# Altium PCB rapidcamera.PcbDoc
Units mil, origin at the board's own origin, x right, y up, seen from the top; angles counter-clockwise.
Board outline 6000 x 4000 mil, 2 copper layers (Top Layer, Bottom Layer); 33 components, 40 nets, 181 pads, 0 vias.
Unrouted connection lines stored in the file: 17.
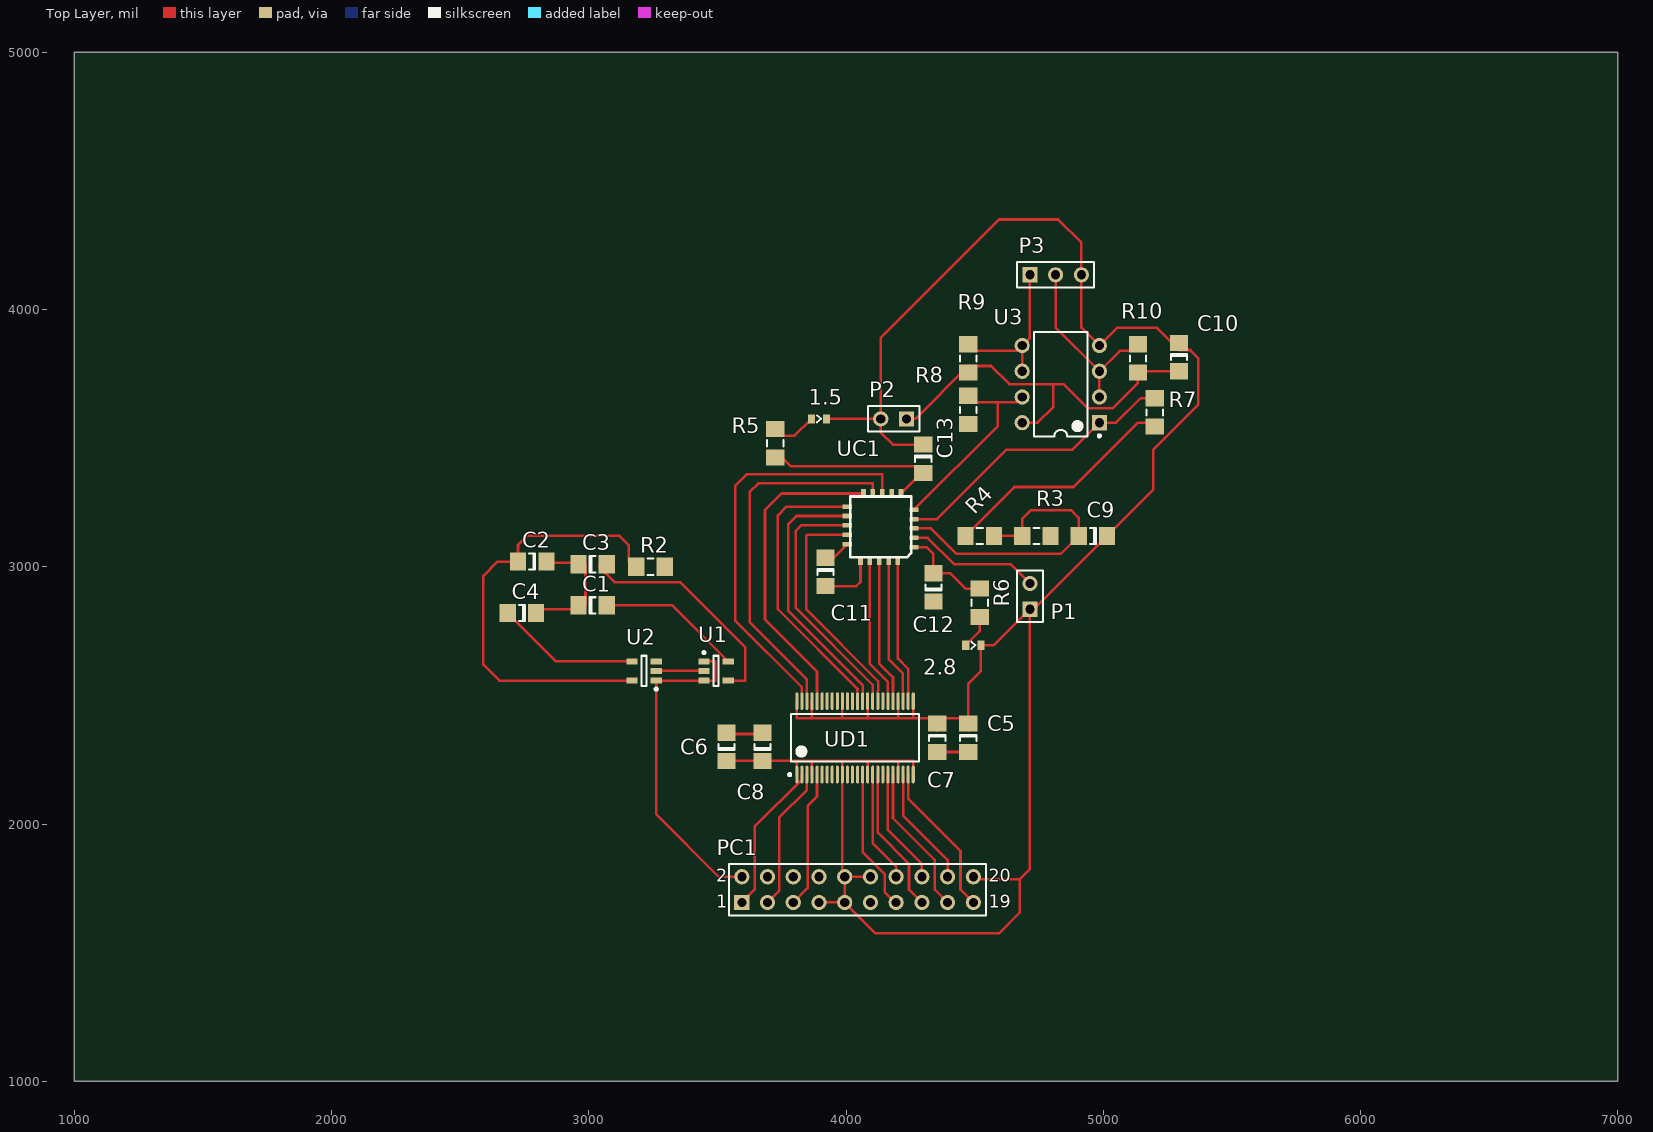
[diagram p0: Top Layer view]
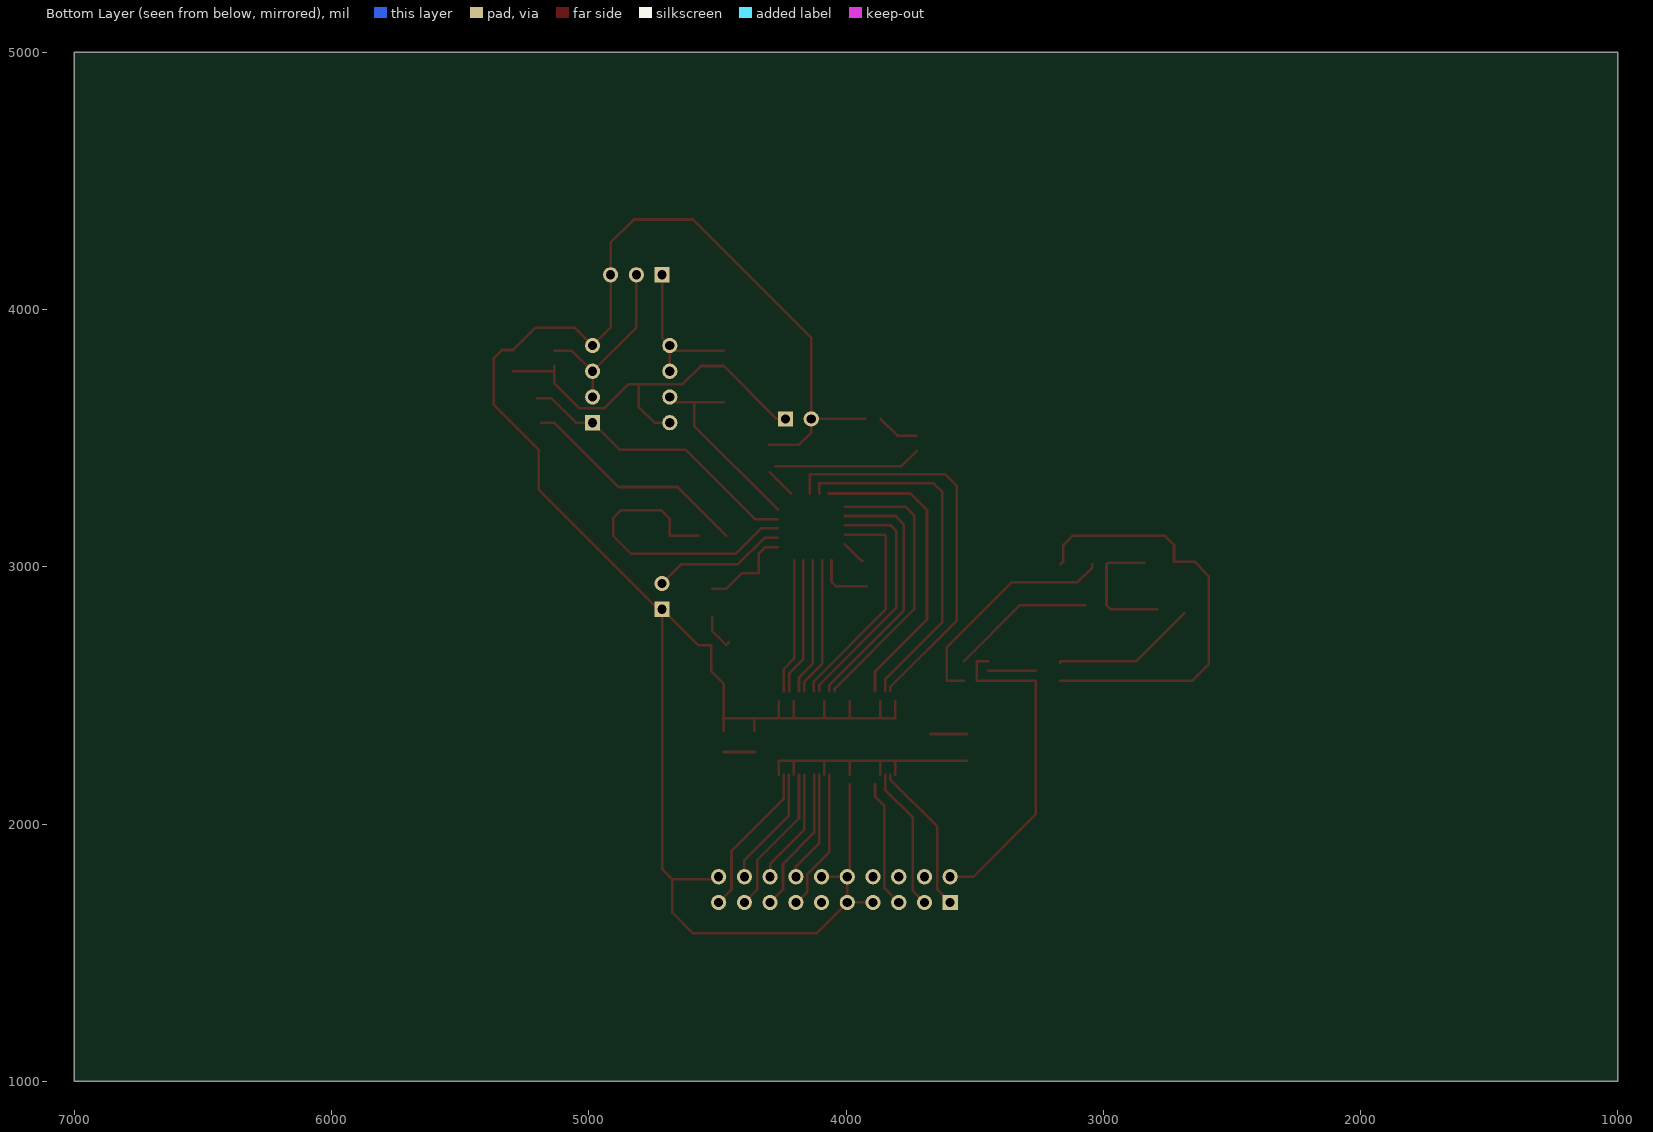
[diagram p1: Bottom Layer view, seen from below]

## Layer stack, top to bottom
Top Layer: signal copper 1.4
Dielectric: dielectric 12.6, FR-4, Dk 4.8
Bottom Layer: signal copper 1.4

## Board outline
1000,1000 7000,1000 7000,5000 1000,5000

## Design rules (kind name [scope] priority, off if disabled: settings)
Clearance [All] p1: gap=6
PolygonConnect [All] p1: connectstyle=Relief reliefconductorwidth=10 reliefentries=4 polygonreliefangle="90 Angle"
RoutingVias [All] p1: holewidth=28 width=50 viastyle="Through Hole" minholewidth=28 minwidth=50 maxholewidth=28 maxwidth=50
SilkscreenOverComponentPads [All] p1: minsilkscreentomaskgap=10
SolderMaskExpansion [All] p1: expansion=4
Width [All] p1: maxlimit=10 minlimit=10 preferedwidth=10
27 further rules are at their usual default settings.

## Components (designator, comment, footprint, x,y, rotation, side; value= is the part's Value field where it differs from the comment)
1.5 "LED2" DIODE1608 3895,3575 r0 top
2.8 "LED2" DIODE1608 4495,2695 r0 top
C1 "C1206" 1206 3015,2850 r0 top
C2 "C1206" 1206 2780,3020 r180 top
C3 "C1206" 1206 3015,3010 r0 top
C4 "C1206" 1206 2740,2820 r180 top
C5 "C1206" 1206 4475,2335 r270 top
C6 "C1206" 1206 3535,2300 r90 top
C7 "C1206" 1206 4355,2335 r270 top
C8 "C1206" 1206 3675,2300 r90 top
C9 "C1206" 1206 4960,3120 r180 top
C10 "C1206" 1206 5295,3815 r270 top
C11 "C1206" 1206 3920,2980 r270 top
C12 "C1206" 1206 4340,2920 r90 top
C13 "C1206" 1206 4300,3420 r270 top
P1 "Header 2" HDR1X2 4715,2835 r90 top
P2 "Header 2" HDR1X2 4235,3575 r180 top
P3 "Header 3" HDR1X3 4715,4135 r0 top
PC1 "Header 10X2" HDR2X10 3595,1695 r0 top
R2 "0" 8-1206 3240,3000 r180 top
R3 "10K" 8-1206 4740,3120 r0 top
R4 "0" 8-1206 4520,3120 r0 top
R5 "165" 8-1206 3725,3480 r270 top
R6 "165" 8-1206 4520,2860 r90 top
R7 "4.7K" 8-1206 5200,3600 r270 top
R8 "4.7K" 8-1206 4475,3610 r270 top
R9 "4.7K" 8-1206 4475,3810 r270 top
R10 "4.7K" 8-1206 5135,3810 r270 top
U1 "TPS79915DDC" TSOT23-5 3495,2595 r0 top
U2 "TPS79928DDC" TSOT23-5 3215,2595 r180 top
U3 "p82b96" DIP-8 4835,3710 r180 top
UC1 "TCM8230MD_1" TCM8230MD 4135,3155 r270 top
UD1 "SN74LVCH16T245" SN74LVCH16T245 4035,2335 r90 top

## Footprints (in the part's own frame and the unit in brackets; to place one, negate y for a bottom-side part, rotate by r counter-clockwise, add the part's x,y. Pads: shape width x height; smd on the part's side, far side on the other; paste and mask are expansions set on the pad)
8-1206 [mm] "Chip Resistor; Body 3.1 x 1.6 mm (LxW typ)"
  rect 1.6x1.8 smd: 1(-1.4,0) 2(1.4,0)
  silkscreen extent -0.3,-0.8 0.3,0.8
1206 [mm] "Chip Capacitor; Body 3.2 x 1.6 mm (LxW typ)"
  rect 1.6x1.8 smd: 1(-1.4,0) 2(1.4,0)
  silkscreen extent -0.3,-0.8 0.3,0.8
DIODE1608 [mm] "Chip Resistor, Body 1.6x0.8mm, IPC High Density"
  rect 0.7x0.9 smd: 1(-0.75,0) 2(0.75,0)
  silkscreen extent -0.2,-0.35 0.2,0.35, body extent -0.85,-0.48 0.85,0.48, height 0.9
DIP-8 [mm] "DIP; 8 Leads; Row Spacing 7.62 mm; Pitch 2.54 mm"
  rect 1.5x1.5 hole 0.9: 1(-3.81,3.81)
  round 1.5 hole 0.9: 2(-3.81,1.27) 3(-3.81,-1.27) 4(-3.81,-3.81) 5(3.81,-3.81) 6(3.81,-1.27) 7(3.81,1.27) 8(3.81,3.81)
  silkscreen extent -3.94,-5.15 2.65,5.23, body extent -3.6,-5.15 3.6,5.15, height 5.08
HDR1X2 [mm] "Connector; Header; 2 Position"
  rect 1.5x1.5 hole 0.9: 1(0,0)
  round 1.5 hole 0.9: 2(2.54,0)
  silkscreen extent -1.27,-1.27 3.81,1.27
HDR1X3 [mm] "Connector; Header; 3 Position"
  rect 1.5x1.5 hole 0.9: 1(0,0)
  round 1.5 hole 0.9: 2(2.54,0) 3(5.08,0)
  silkscreen extent -1.27,-1.27 6.35,1.27
HDR2X10 [mm] "Connector; Header; 10x2 Position"
  rect 1.5x1.5 hole 0.9: 1(0,0)
  round 1.5 hole 0.9: 2(0,2.54) 3(2.54,0) 4(2.54,2.54) 5(5.08,0) 6(5.08,2.54) 7(7.62,0) 8(7.62,2.54) 9(10.16,0) 10(10.16,2.54) 11(12.7,0) 12(12.7,2.54) 13(15.24,0) 14(15.24,2.54) 15(17.78,0) 16(17.78,2.54) 17(20.32,0) 18(20.32,2.54) 19(22.86,0) 20(22.86,2.54)
  silkscreen extent -1.27,-1.27 24.13,3.81
SN74LVCH16T245 [mm]
  oval 1.75x0.3 smd: 1(-3.625,5.75) 2(-3.625,5.25) 3(-3.625,4.75) 4(-3.625,4.25) 5(-3.625,3.75) 6(-3.625,3.25) 7(-3.625,2.75) 8(-3.625,2.25) 9(-3.625,1.75) 10(-3.625,1.25) 11(-3.625,0.75) 12(-3.625,0.25) 13(-3.625,-0.25) 14(-3.625,-0.75) 15(-3.625,-1.25) 16(-3.625,-1.75) 17(-3.625,-2.25) 18(-3.625,-2.75) 19(-3.625,-3.25) 20(-3.625,-3.75) 21(-3.625,-4.25) 22(-3.625,-4.75) 23(-3.625,-5.25) 24(-3.625,-5.75) 25(3.625,-5.75) 26(3.625,-5.25) 27(3.625,-4.75) 28(3.625,-4.25) 29(3.625,-3.75) 30(3.625,-3.25) 31(3.625,-2.75) 32(3.625,-2.25) 33(3.625,-1.75) 34(3.625,-1.25) 35(3.625,-0.75) 36(3.625,-0.25) 37(3.625,0.25) 38(3.625,0.75) 39(3.625,1.25) 40(3.625,1.75) 41(3.625,2.25) 42(3.625,2.75) 43(3.625,3.25) 44(3.625,3.75) 45(3.625,4.25) 46(3.625,4.75) 47(3.625,5.25) 48(3.625,5.75)
  silkscreen extent -3.75,-6.3 2.35,6.57, body extent -3.1,-6.3 3.1,6.3, height 1.2
TCM8230MD [mm] "VGA CAMERA MODULE 640x480"
  rect 0.45x0.6 on Top Overlay: 0(-2.275,-1.4) 0(-1.625,-1.4) 0(-0.975,-1.4) 0(-0.325,1.4) 0(-0.325,-1.4) 0(0.325,1.4) 0(0.325,-1.4) 0(0.975,1.4) 0(1.625,1.4) 0(2.275,1.4)
  rect 0.6x0.45 on Top Overlay: 0(-1.4,1.625) 0(-1.4,2.275) 0(-1.4,0.975) 0(-1.4,-0.325) 0(-1.4,0.325) 0(1.4,-0.325) 0(1.4,0.325) 0(1.4,-0.975) 0(1.4,-2.275) 0(1.4,-1.625)
  rect 0.45x0.9 smd: 1(2,3.3) 2(1.075,3.3) 3(0.15,3.3) 4(-0.775,3.3) 5(-1.7,3.3) 11(-2,-3.3) 12(-1.075,-3.3) 13(-0.15,-3.3) 14(0.775,-3.3) 15(1.7,-3.3)
  rect 0.9x0.45 smd: 6(-3.3,2) 7(-3.3,1.075) 8(-3.3,0.15) 9(-3.3,-0.775) 10(-3.3,-1.7) 16(3.3,-2) 17(3.3,-1.075) 18(3.3,-0.15) 19(3.3,0.775) 20(3.3,1.7)
  silkscreen extent -3,-3 3,3
TSOT23-5 [mm] "SOT23, 5-Leads, Body 3.0x3.0mm (max), Pitch 0.95mm, IPC Medium Density"
  rect 1.1x0.6 smd: 1(-1.2,0.95) 2(-1.2,0) 3(-1.2,-0.95) 4(1.2,-0.95) 5(1.2,0.95)
  silkscreen extent -1.32,-1.5 0.25,1.92, body extent -0.87,-1.52 0.87,1.53, height 1.1

## Part data
1.5 2.8: "Typical RED, GREEN, YELLOW, AMBER GaAs LED"
C1 C2 C3 C4 C5 C6 C7 C8 C9 C10 C11 C12 C13: "Ceramic Chip Capacitor - Standard"
P1 P2: "Header, 2-Pin"
P3: "Header, 3-Pin"
PC1: "Header, 10-Pin, Dual row"
R2 R3 R4 R5 R6 R7 R8 R9 R10: library part ERJ8GE, "Thick Film Chip Resistor, 1 Ohm to 10M Ohm Range, 5% Tolerance, 1206 Size, 0.25 W"
U1 U2: library part TPS799xxDDC, "200mA, Low Quiescent Current, Ultra-Low Noise, High PSRR  Low Dropout Linear Regulator"
UC1: "VGA CAMERA MODULE 640x480"
UD1: "16-bit bus transceiver with voltage regulation."

## Nets (pads, with @x,y where several pads share a name; then routed paths per layer and width w, separated by ;. In a path a pad name is that pad's centre, name@x,y a point inside that pad or via, vN(x,y) a via of type N, cw(c..) or ccw(c..) an arc to the next point about the centre after c; other vN are vias at no path point)
C1_CLK: P1.2 UC1.2 | length 523.7
  Top Layer w10: UC1.2 4317.32,3112.68 4420,3010 4640,3010 P1.2
C1_DOUT0: UD1.13
C1_DOUT1: PC1.13 UD1.14 | length 556.3
  Top Layer w10: UD1.14 4064.53,1890.47 4150,1805 4150,1735 4192.5,1692.5 PC1.13
C1_DOUT2: PC1.14 UD1.16 | length 435
  Top Layer w10: UD1.16 4103.9,1926.1 4195,1835 PC1.14
C1_DOUT3: PC1.15 UD1.17 | length 568.3
  Top Layer w10: UD1.17 4123.58,1966.42 4245,1845 4245,1745 PC1.15
C1_DOUT4: PC1.16 UD1.19 | length 452
  Top Layer w10: UD1.19 4162.95,1977.05 4295,1845 PC1.16
C1_DOUT5: PC1.17 UD1.20 | length 585.2
  Top Layer w10: UD1.20 4182.64,2022.36 4345,1860 4345,1745 PC1.17
C1_DOUT6: PC1.18 UD1.22 | length 468.9
  Top Layer w10: UD1.22 4222.01,2032.99 4395,1860 PC1.18
C1_DOUT7: PC1.19 UD1.23 | length 602.2
  Top Layer w10: UD1.23 4241.69,2098.31 4445,1895 4445,1745 PC1.19
C1_DVSS: 1.5.2 2.8.2 C1.1 C2.1 C3.1 C4.1 C5.1 C6.1 C7.1 C8.1 C9.1 C10.1 C11.1 C12.1 C13.1 P1.1 P2.2 P3.3 PC1.7 PC1.9 PC1.10 PC1.12 PC1.20 U1.2 U2.2 U3.4 UC1.7 UC1.15 UD1.1 UD1.4 UD1.10 UD1.15 UD1.21 UD1.24 UD1.25 UD1.28 UD1.34 UD1.39 UD1.45 UD1.48 | length 10302.3
  Top Layer w10: C4.1@2790,2835 2972.44,2835 2987.44,2850 2987.44,3010 2982.44,3015 C2.1@2840.12,3015 ; U2.2 U1.2 ; C6.1@3531.38,2246.38 3805,2246.38 ; UD1.1 3808.62,2242.76 3805,2246.38 ; UD1.48 3808.62,2411.38 3870,2411.38 ; UD1.4 3867.68,2243.7 3865,2246.38 ; UD1.45 3867.68,2413.7 3870,2411.38 ; PC1.7 PC1.9 ; 1.5.2 P2.2 ; C11.1@3935,3022.56 3939.57,3022.56 UC1.15 ; 3985,2241.38 3985.79,2240.59 UD1.10 ; 3985.79,2153.86 3985.79,1795 3985,1795 3995,1785 PC1.9 ; UD1.39 3985.79,2412.17 3985,2411.38 ; PC1.10 PC1.12 ; UD1.15 4084.21,2245.59 4085,2246.38 ; UD1.34 4084.21,2412.17 4085,2411.38 ; UD1.21 4202.32,2243.7 4205,2246.38 ; UD1.28 4202.32,2413.7 4200,2411.38 ; UD1.24 4261.38,2246.38 4205,2246.38 ; UD1.25 4261.38,2412.76 4260,2411.38 ; C13.1@4299.88,3475 4182.56,3475 4135,3522.56 P2.2 ; C7.1@4355,2362.56 4356.38,2363.94 C7.1@4356.38,2411.38 ; C5.1@4475,2362.56 C5.1@4475,2407.76 ; PC1.20 4505,1785 4675,1785 ; 3805,2246.38 3865,2246.38 ; 3865,2246.38 4085,2246.38 ; 3870,2411.38 3985,2411.38 ; 3985,2411.38 4085,2411.38 ; PC1.9 4115,1575 4595,1575 4675,1655 4675,1785 ; 4085,2246.38 4205,2246.38 ; 4085,2411.38 4200,2411.38 ; P2.2 4135,3890 4595,4350 4825,4350 4915,4260 P3.3 4915,3930 U3.4 5055,3930 5207.56,3930 5295,3842.56 5337.44,3842.56 5370,3810 5370,3630 5195,3455 5195,3299.88 C9.1 4730.12,2835 P1.1 ; 4200,2411.38 4260,2411.38 ; 4260,2411.38 C7.1@4356.38,2411.38 ; C7.1@4356.38,2411.38 C5.1@4475,2411.38 ; C5.1@4475,2407.76 4478.62,2411.38 C5.1@4475,2411.38 ; C5.1@4475,2407.76 C5.1@4475,2411.38 ; C5.1@4475,2411.38 4475,2545 4524.53,2594.53 2.8.2 4575,2695 P1.1 ; 4675,1785 4715,1825 P1.1
C1_I2CVCC: C10.2 P2.1 R9.2 R10.2 U3.8 | length 1547.4
  Top Layer w10: P2.1 4269.53,3575 4475,3780.47 4564.53,3780.47 4635,3710 4805,3710 ; U3.8 4745,3560 4805,3620 4805,3710 ; R10.2@5135,3780.47 5135,3715 5035.47,3615.47 4940.47,3615.47 4845.94,3710 4805,3710 ; R10.2@5142.56,3759.88 C10.2
C1_RST: PC1.4
C1_SCL: P3.1 R9.1 U3.5 U3.6 | length 605.9
  Top Layer w10: R9.1@4475,3839.53 4664.53,3839.53 U3.5 ; U3.6 U3.5 ; P3.1 4715,3890 U3.5
C1_SDA: P3.2 R10.1 U3.2 U3.3 | length 728.4
  Top Layer w10: P3.2 4815,3930 U3.3 ; U3.2 U3.3 ; R10.1@5135,3839.53 5064.53,3839.53 U3.3
C_DCLK: UC1.10 UD1.44 | length 1197.6
  Top Layer w10: 3887.36,2516.14 3887.36,2592.64 3685,2795 3685,3220 3749.92,3284.92 UC1.10
C_HD: UC1.9 UD1.46 | length 1399.6
  Top Layer w10: 3847.99,2516.14 3847.99,2562.01 3625,2785 3625,3290 3659.49,3324.49 4104.49,3324.49 UC1.9
C_HORIZONTALSYNC: PC1.3 UD1.3 | length 560.7
  Top Layer w10: PC1.3 3740,1740 3740,2025 3847.99,2132.99 UD1.3
C_SDCLK: PC1.5 UD1.5 | length 497.1
  Top Layer w10: PC1.5 3850.47,1750.47 3850.47,2070.47 3887.36,2107.36 3887.36,2153.86
C_VD: UC1.8 UD1.47 | length 1570.8
  Top Layer w10: 3827.99,2516.45 3827.99,2532.01 3569.09,2790.91 3569.09,3314.09 3615,3360 4140.91,3360 UC1.8
C_VERTICALSYNC: PC1.1 UD1.2 | length 593.9
  Top Layer w10: PC1.1 3645,1745 3645,1990 3828.31,2173.31 UD1.2
Net0_2: C1.2 U1.5 | length 562.3
  Top Layer w10: C1.2 3324.65,2850 U1.5
Net1.5_1: 1.5.1 R5.1 | length 167.6
  Top Layer w10: R5.1@3725,3509.53 3800,3509.53 1.5.1
Net2.8_1: 2.8.1 R6.1 | length 147.3
  Top Layer w10: 2.8.1@4455,2705.47 2.8.1 4520,2749.53 R6.1
NetC2_2: C2.2 R2.2 U2.5 | length 1709.6
  Top Layer w10: R2.2@3165.47,3010 3155,3020.47 3155,3085 3120,3120 2760,3120 2724.88,3084.88 C2.2 2645,3020 2590,2965 2590,2620 2652.4,2557.6 U2.5
NetC3_2: C3.2 U1.4 | length 901.2
  Top Layer w10: C3.2@3042.56,3010 3042.56,2997.44 3100,2940 3355,2940 3607.6,2687.4 3607.6,2557.6 U1.4
NetC4_2: C4.2 U2.4 | length 565.7
  Top Layer w10: C4.2 2872.48,2632.4 U2.4 U2.4@3167.76,2627.24
NetC9_2: C9.2 R3.1 R4.2 UC1.3 | length 1201.7
  Top Layer w10: UC1.3 4330.91,3149.09 4430,3050 4834.88,3050 C9.2 4904.88,3190.12 4875,3220 4720,3220 4684.88,3184.88 R3.1 R4.2
NetUC1_11: UC1.11 UD1.36 | length 1096.2
  Top Layer w10: UC1.11 3768.74,3233.74 3735,3200 3735,2834.9 4045,2524.9 4044.53,2524.42 4044.53,2516.45
NetUC1_12: UC1.12 UD1.35 | length 1012.6
  Top Layer w10: UC1.12 3807.32,3197.32 3775,3165 3775,2830 4065,2540 4065,2516.61 4064.53,2516.14
NetUC1_13: UC1.13 UD1.33 | length 956.2
  Top Layer w10: UC1.13 3825.91,3160.91 3805,3140 3805,2840 4103.72,2541.28 4103.72,2516.32
NetUC1_14: UC1.14 UD1.32 | length 882.2
  Top Layer w10: UC1.14 3849.49,3124.49 3845,3120 3845,2835 4125,2555 4125,2517.56 4123.72,2516.28
NetUC1_17: UC1.17 UD1.30 | length 537.6
  Top Layer w10: UC1.17 4092.68,2622.32 4162.64,2552.36 4162.64,2516.45
NetUC1_18: UC1.18 UD1.29 | length 531.1
  Top Layer w10: UC1.18 4129.09,2623.54 4182.64,2570 4182.64,2516.14
NetUC1_19: UC1.19 UD1.27 | length 531.5
  Top Layer w10: UC1.19 4165.51,2640.9 4221.42,2585 4221.42,2516.73
NetUC1_20: UC1.20 UD1.26 | length 526.4
  Top Layer w10: UC1.20 4201.93,2643.07 4241.42,2603.58 4241.42,2515
SCL: R7.1 U3.1 UC1.4 | length 1129.6
  Top Layer w10: UC1.4 4354.49,3185.51 4623.98,3455 4880,3455 U3.1 5050,3560 5145.12,3655.12 R7.1
SDA: R8.1 U3.7 UC1.5 | length 770.7
  Top Layer w10: UC1.5 4590,3547.01 4590,3639.53 ; R8.1@4475,3639.53 4590,3639.53 ; U3.7 4664.53,3639.53 4590,3639.53
VCC1.5: C13.2 R5.2 U2.3 UC1.6 | length 692.5
  Top Layer w10: R5.2@3725,3450.47 3785.47,3390 C13.2@4274.88,3390 ; UC1.6 C13.2@4296.85,3368.03
VCC2.8: C6.2 C8.2 C11.2 C12.2 R2.1 R3.2 R4.1 R6.2 R7.2 R8.2 UC1.1 UC1.16 UD1.31 UD1.42 | length 1634.5
  Top Layer w10: C6.2@3530,2350 C8.2@3670,2350 ; C11.2 4039.88,2924.88 4056.26,2941.26 UC1.16 ; UC1.1 4313.74,3076.26 4340,3050 C12.2 4404.88,2975.12 4464.88,2915.12 R6.2 ; R4.1 4654.88,3310 4884.53,3310 5135,3560.47 R7.2@5184.41,3560.47
VCC3.3: C5.2 C7.2 PC1.2 U1.1 U1.3 U2.1 UD1.7 UD1.18 | length 1423.3
  Top Layer w10: U1.1 3492.4,2632.4 3492.4,2557.6 U2.1 3262.24,2037.24 3262.5,2037.5 3505,1795 PC1.2 ; C7.2 C5.2
pads on no net: PC1.6 PC1.8 PC1.11 UC1.0 UD1.6 UD1.8 UD1.9 UD1.11 UD1.12 UD1.37 UD1.38 UD1.40 UD1.41 UD1.43

## Text inside footprints (layer, text, board x,y; h text height)
PC1: Top Overlay "2" at 3495,1775 h50; Top Overlay "1" at 3495,1675 h50; Top Overlay "19" at 4555,1675 h50; Top Overlay "20" at 4555,1775 h50